# Altium PCB kt404c.pcbdoc
Units mil, origin at the board's own origin, x right, y up, seen from the top; angles counter-clockwise.
Board outline 1965 x 2475 mil, 2 copper layers (Top Layer, Bottom Layer); 19 components, 24 nets, 81 pads, 43 vias.
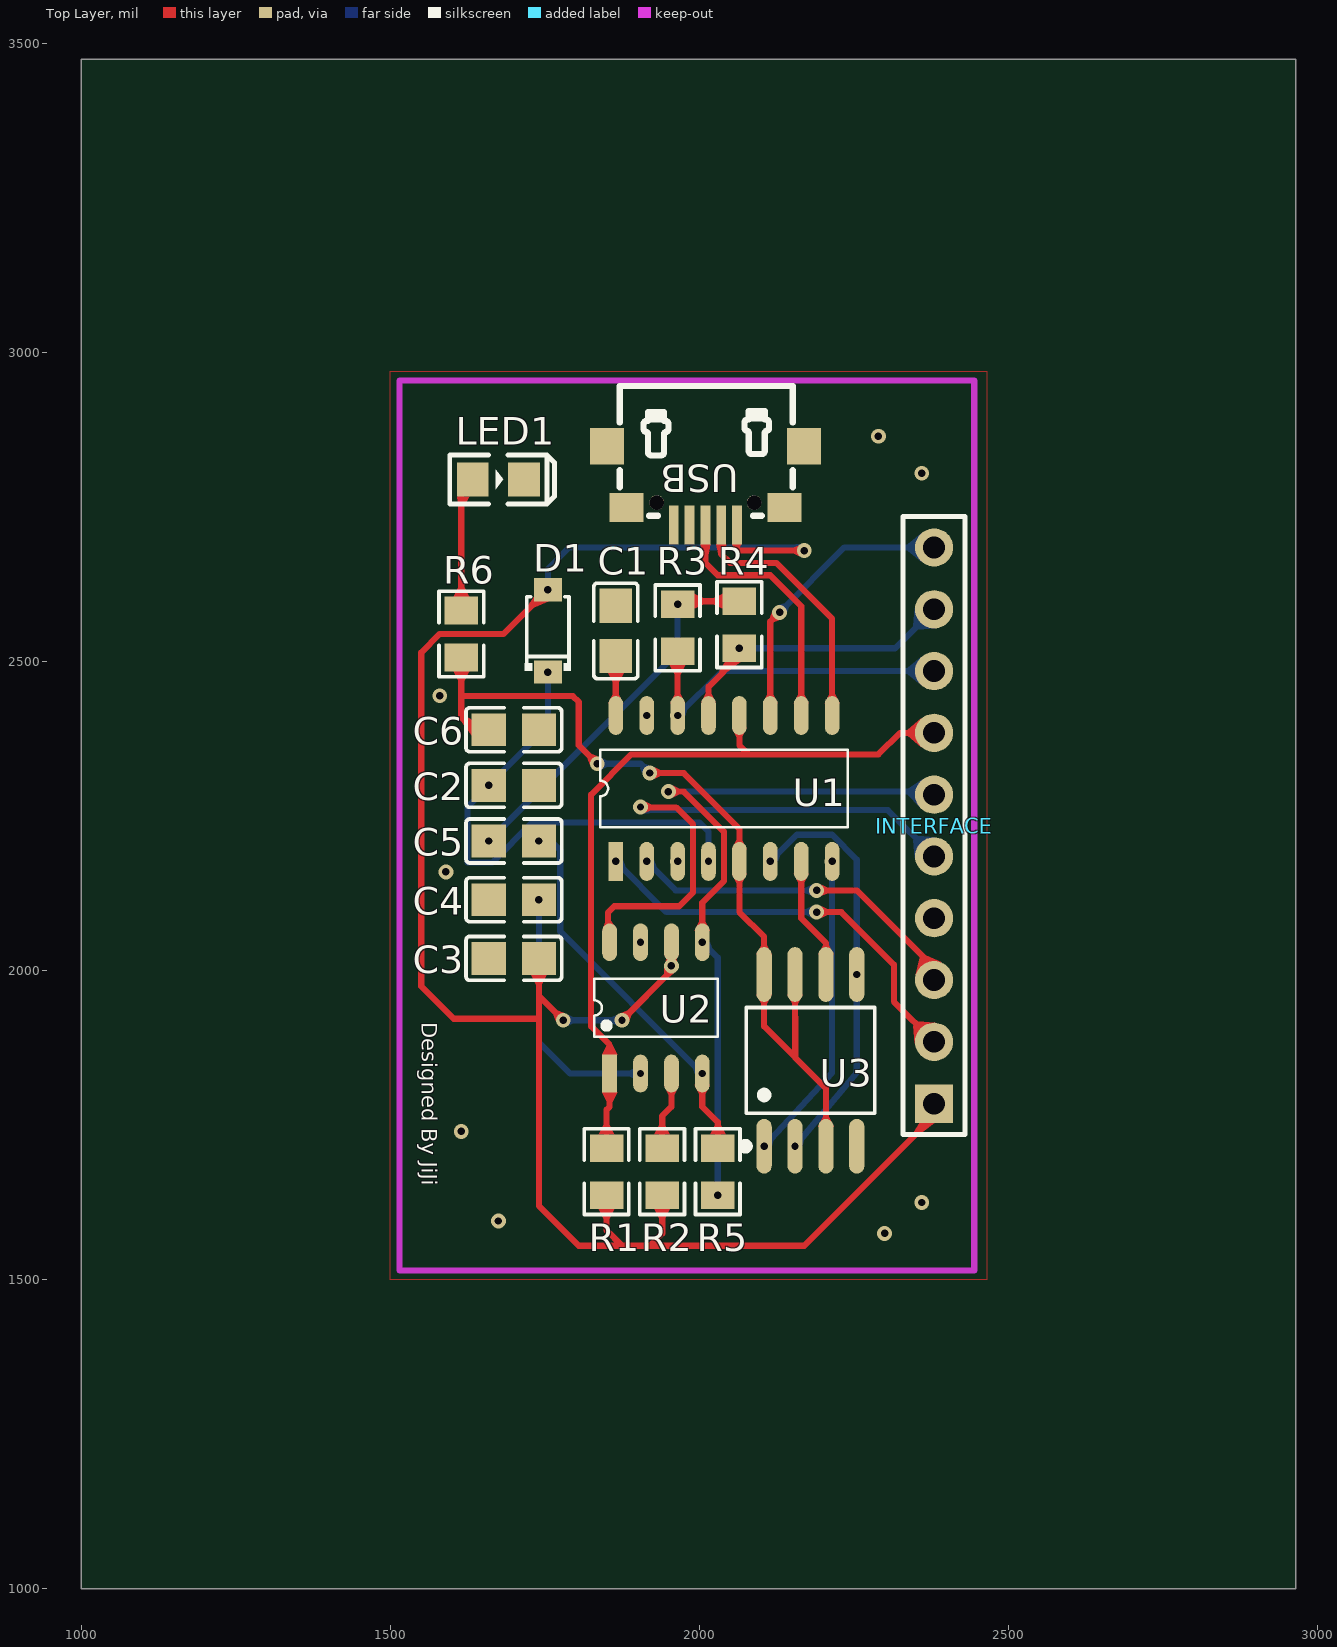
[diagram p0: Top Layer view]
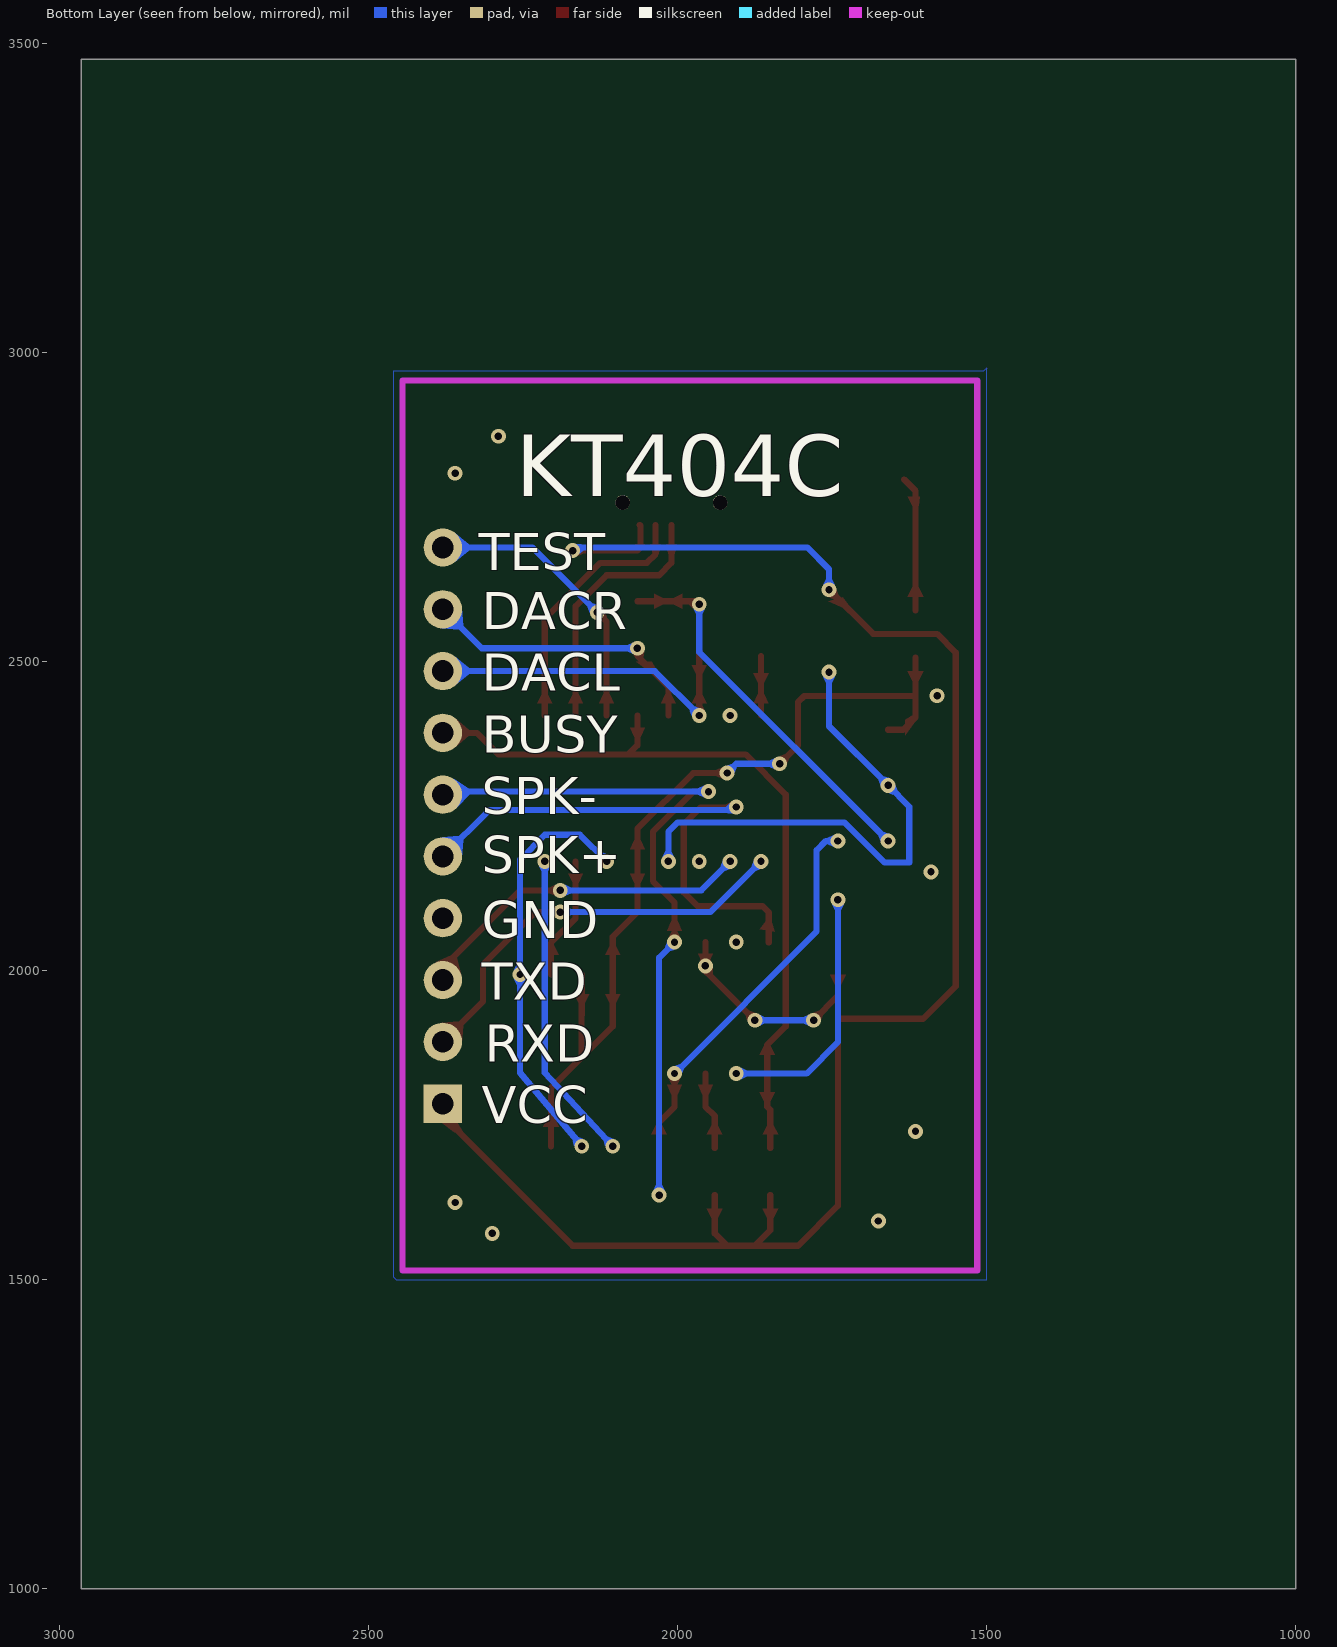
[diagram p1: Bottom Layer view, seen from below]

## Layer stack, top to bottom
Top Solder: solder mask 0.4, Solder Resist, Dk 3.5
Top Layer: signal copper 1.4
Dielectric1: dielectric 12.6, FR-4, Dk 4.8
Bottom Layer: signal copper 1.4
Bottom Solder: solder mask 0.4, Solder Resist, Dk 3.5

## Board outline
2965,1000 1000,1000 1000,3475 2965,3475

## Design rules (kind name [scope] priority, off if disabled: settings)
Clearance [All] p1: gap=10 ignorepadtopadclearanceinfootprint=FALSE except(0: Arc-Hole Track-Hole SMDPad-Hole THPad-Hole Via-Hole Fill-Hole Poly-Hole Region-Hole Text-Hole)
PolygonConnect [All] p1: connectstyle=Relief reliefconductorwidth=10 reliefentries=4 polygonreliefangle="90 Angle" airgapwidth=10
RoutingVias [All] p1: holewidth=28 width=50 viastyle="Through Hole" minholewidth=28 minwidth=50 maxholewidth=28 maxwidth=50
SolderMaskExpansion [All] p1: expansion=4 istentingtop=FALSE
Width [All] p1: maxlimit=10 minlimit=10 preferedwidth=10
30 further rules are at their usual default settings.

## Components (designator, comment, footprint, x,y, rotation, side; value= is the part's Value field where it differs from the comment)
C1 "1uF" C0805 1865,2550 r90 top
C2 "0.1u" C0805 1700,2300 r0 top
C3 "22uF" C0805 1700,2020 r180 top
C4 "1uF" C0805 1700,2115 r0 top
C5 "0.1uF" C0805 1700,2210 r180 top
C6 "1uF" C0805 1700,2390 r0 top
D1 "1N4007W" SOD-123_L2.8-W1.8-LS3.7-RD 1755,2550 r90 top
INTERFACE "HDR-F-2.54_1x10" HDR-F-2.54_1X10 2380,2235 r90 top
LED1 "LED-0805_R" LED0805_RED 1675,2795 r0 top
R1 "10k" R0805 1850,1675 r270 top
R2 "10k" R0805 1940,1675 r90 top
R3 "22k" R0805 1965,2555 r270 top
R4 "22k" R0805 2065,2560 r270 top
R5 "NC" R0805 2030,1675 r270 top
R6 "10k" R0805 1615,2545 r90 top
U1 "KT404C" SOP16 2040,2295 r90 top
U2 "HAA2018" SOP8 1930,1940 r0 top
U3 "W25Q80DVSSIG" SOIC-8_L5.3-W5.3-P1.27-LS8.0-BL 2180,1855 r0 top
USB "U-F-M5SS-W-1" MICRO-USB-SMD_MICRO-USB-A11 2010,2785 r180 top

## Footprints (in the part's own frame and the unit in brackets; to place one, negate y for a bottom-side part, rotate by r counter-clockwise, add the part's x,y. Pads: shape width x height; smd on the part's side, far side on the other; paste and mask are expansions set on the pad)
C0805 [mm]
  rect 1.41x1.35 smd: 1(-1.03,0) 2(1.03,0)
  silkscreen extent -1.96,-0.9 1.96,0.9
HDR-F-2.54_1X10 [mil]
  rect 62x62 hole 35: 1(-450,0)
  round 62 hole 35: 2(-350,0) 3(-250,0) 4(-150,0) 5(-50,0) 6(50,0) 7(150,0) 8(250,0) 9(350,0) 10(450,0)
  silkscreen extent -500,-50 500,50
LED0805_RED [mil]
  rect 51.2x55.1 smd: 1(-41.35,0) 2(41.35,0)
  silkscreen extent -79,-39 91,39
MICRO-USB-SMD_MICRO-USB-A11 [mm]
  rect 0.4x1.6 smd: 1(-1.3,1.616) 2(-0.65,1.616) 3(0,1.616) 4(0.65,1.616) 5(1.3,1.616)
  rect 1.4x1.2 smd: 6(3.25,0.893) 7(-3.25,0.893)
  rect 1.4x1.5 smd: 8(-4.051,-1.617) 9(4.051,-1.617)
  round 0.6 hole 0.6 unplated: ""(-2,0.694) ""(2,0.694)
  silkscreen extent -3.59,-4.1 3.52,1.24
R0805 [mil]
  rect 44.59x54.21 smd: 1(-38.04,0) 2(38.04,0)
  silkscreen extent -69,-36 69,36
SOD-123_L2.8-W1.8-LS3.7-RD [mm]
  rect 0.95x1.15 smd: 1(-1.693,0) 2(1.693,0)
  silkscreen extent -1.63,-0.94 1.41,0.94
SOIC-8_L5.3-W5.3-P1.27-LS8.0-BL [mm]
  oval 0.63x2.25 smd: 1(-1.905,-3.53) 2(-0.635,-3.53) 3(0.635,-3.53) 4(1.905,-3.53) 5(1.905,3.53) 6(0.635,3.53) 7(-0.635,3.53) 8(-1.905,3.53)
  silkscreen extent -2.82,-3.68 2.64,2.18
SOP8 [mil]
  rect 24x61 smd: 1(-75,-106.3)
  oval 24x61 smd: 2(-25,-106.3) 3(25,-106.3) 4(75,-106.3) 5(75,106.3) 6(25,106.3) 7(-25,106.3) 8(-75,106.3)
  silkscreen extent -100,-47 100,47
SOP16 [mm]
  rect 1.6x0.6 smd: 1(-3,4.445)
  oval 1.6x0.6 smd: 2(-3,3.175) 3(-3,1.905) 4(-3,0.635) 5(-3,-0.635) 6(-3,-1.905) 7(-3,-3.175) 8(-3,-4.445) 9(3,-4.445) 10(3,-3.175) 11(3,-1.905) 12(3,-0.635) 13(3,0.635) 14(3,1.905) 15(3,3.175) 16(3,4.445)
  silkscreen extent -1.6,-5.08 1.6,5.08

## Via types
v1: diameter 24, hole 12, Top Layer to Bottom Layer, 43 vias

## Nets (pads, with @x,y where several pads share a name; then routed paths per layer and width w, separated by ;. In a path a pad name is that pad's centre, name@x,y a point inside that pad or via, vN(x,y) a via of type N, cw(c..) or ccw(c..) an arc to the next point about the centre after c; other vN are vias at no path point)
BUSY: INTERFACE.7 R1.1 U1.12 U2.1 | length 1252.2
  Top Layer w10: R1.1 1850,1775 1855,1780 U2.1 1855,1880 1825,1910 1825,2285 1890,2350 2080,2350 ; U1.12 2065,2365 2080,2350 ; INTERFACE.7 2325,2385 2290,2350 2080,2350
C5_2: C5.2 R3.1 R4.1 | length 611.7
  Top Layer w10: v1(1965,2593.04) 1970,2598 R4.1
  Bottom Layer w10: v1(1659.45,2210) 1965,2515.55 v1(1965,2593.04)
DACL: INTERFACE.8 R3.2 U1.14 | length 548.7
  Top Layer w10: v1(1965,2413.11) 1965,2465 R3.2
  Bottom Layer w10: v1(1965,2413.11) 2036.89,2485 INTERFACE.8
DACR: INTERFACE.9 R4.2 U1.13 | length 470.7
  Top Layer w10: U1.13 2015,2460 2065,2510 v1(2065,2521.96)
  Bottom Layer w10: v1(2065,2521.96) 2316.96,2521.96 INTERFACE.9
GND: C1.2 C2.2 C3.2 C4.1 C6.2 INTERFACE.4 LED1.2 U1.3 U1.15 U2.7 U3.4 USB.5 USB.6 USB.7 USB.8 USB.9
  other v1: 2300,1575 1675,1595 2360,1625 1615,1740 1905,2046.3 1590,2160 1965,2176.89 1915,2413.11 1580,2445 2360,2805 2290,2865
LED1_1: LED1.1 R6.2 | length 219.7
  Top Layer w10: R6.2 1615,2776.4 LED1.1
OUT_3V3: C6.1 R6.1 U1.5 U3.3 U3.7 U3.8 | length 1436.1
  Top Layer w10: 1615,2444.55 1795.45,2444.55 1805,2435 1805,2365 v1(1835,2335) ; R6.1 1615,2410 1635,2390 C6.1@1659.5,2390 ; v1(1920,2320) 1975,2320 2065,2230 U1.5 2065,2095 2105,2055 U3.8 2105,1910 2205,1810 U3.3 ; U3.7 2155.5,1859.5
  Bottom Layer w10: v1(1835,2335) 1905,2335 v1(1920,2320)
RXD: INTERFACE.2 U1.1 | length 671.1
  Top Layer w10: v1(2190,2095) 2230,2095 2315,2010 2315,1950 INTERFACE.2
  Bottom Layer w10: v1(1865,2176.89) 1946.89,2095 v1(2190,2095)
S$848: 
SPICS: U1.8 U3.1 | length 503.9
  Bottom Layer w10: v1(2105,1716.02) 2215,1835 v1(2215,2176.89)
SPIDO: U1.6 U3.2 U3.5 | length 674.8
  Bottom Layer w10: v1(2115,2176.89) 2158.1,2220 2215,2220 2255,2180 2255,2000 2255,1835 v1(2155,1716.02)
  other v1: 2255,1993.98
SPISCK: U1.7 U3.6 | length 199.5
  Top Layer w10: U1.7 2165,2085 2205,2045 U3.6
SPK+: INTERFACE.5 U2.8 | length 916.7
  Top Layer w10: U2.8@1852.5,2045.7 1852.5,2094.4 1862.5,2104.4 1967.5,2104.4 1990,2126.9 1990,2236.9 1962.5,2264.4 v1@1902.5,2264.4
  Bottom Layer w10: v1(1905,2265) 1910,2260 2305,2260 INTERFACE.5
SPK-: INTERFACE.6 R5.2 U2.5 | length 1161.9
  Top Layer w10: v1(1950,2290) 1975,2290 2040,2225 2040,2145 2005,2110 v1(2005,2046.3)
  Bottom Layer w10: v1(1950,2290) 2375,2290 INTERFACE.6 ; v1(2005,2046.3) 2030,2021.3 v1(2030,1636.96)
TEST_KEY: INTERFACE.10 U1.11 | length 466.6
  Top Layer w10: U1.11 2115,2565 v1(2130,2580)
  Bottom Layer w10: v1(2130,2580) 2235,2685 INTERFACE.10
TXD: INTERFACE.3 U1.2 | length 556.2
  Top Layer w10: v1(2190,2130) 2255,2130 2380,2005 INTERFACE.3
  Bottom Layer w10: v1(1915,2176.89) 1961.89,2130 v1(2190,2130)
U1_16: C1.1 U1.16 | length 96.4
  Top Layer w10: U1.16 1865,2455 C1.1@1865,2509.5
U2_2: C4.2 U2.2 | length 416
  Bottom Layer w10: v1@1740.5,2115 1740.5,1884.5 1791.3,1833.7 v1(1905,1833.7)
  other v1: 1740.55,2115
U2_3: R2.2 U2.3 | length 126.9
  Top Layer w10: R2.2 1940,1765 1955,1780 U2.3
U2_4: C5.1 R5.1 U2.4 | length 628.3
  Top Layer w10: v1(2005,1833.7) 2005,1780 2030,1755 R5.1
  Bottom Layer w10: v1(1740.55,2210) 1760,2210 1775,2195 1775,2063.7 v1(2005,1833.7)
USBDM: U1.9 USB.2 | length 426.5
  Top Layer w10: USB.2 2035.6,2674.4 2050,2660 2125,2660 2215,2570 U1.9
USBDP: U1.10 USB.3 | length 422.3
  Top Layer w10: USB.3 2010,2660 2030,2640 2115,2640 2165,2590 U1.10
VCC: C3.1 D1.2 INTERFACE.1 R1.2 R2.1 U2.6 USB.1 | length 3280.3
  Top Layer w10: 1740.5,1922.2 1602.8,1922.2 1550,1975 1550,2515 1580,2545 1683.4,2545 v1(1755,2616.63) ; 1740.5,1959.8 v1(1780,1920) ; C3.1@1740.5,2020 1740.5,1619.5 1805,1555 1875,1555 ; R1.2 1850,1580 1875,1555 ; v1(1875,1920) 1955,2000 v1(1955,2007.94) ; R2.1 1940,1575 1920,1555 ; v1(1955,2007.94) U2.6 ; USB.1 2060,2720.2 2060,2685 2065,2680 v1(2170,2680) ; INTERFACE.1 2380,1765 2170,1555 1920,1555 ; 1875,1555 1920,1555
  Bottom Layer w10: v1(1755,2616.63) 1755,2650 1790,2685 2165,2685 v1(2170,2680) ; v1(1780,1920) v1(1875,1920)
VMCU: C2.1 D1.1 U1.4 | length 833.5
  Bottom Layer w10: v1(1659.45,2300) 1755,2395.55 v1(1755,2483.37) ; v1@1659.5,2300 1625,2265.5 1625,2175 1665,2175 1730,2240 2000,2240 2015,2225 v1(2015,2176.89)
pads on no net: USB. USB.4

## Polygon pours and split planes (outlines as drawn)
GND on Bottom Layer "Bottom Layer-GND" (solid, pour order 0): 1500,2975 1505,2970 2460,2970 2460,1505 2455,1500 1500,1500
GND on Top Layer "Top Layer-GND" (solid, pour order 1): 1500,2970 2465,2970 2465,1500 1500,1500

## Other copper
Top Layer:
  region net SPISCK: 2217.4,2025.87 2192.6,2025.87 2200,2040.87 2210,2040.87
  region net OUT_3V3: 2167.4,1962.23 2142.6,1961.95 2150.17,1947.03 2160.17,1947.15
  region net OUT_3V3: 2117.4,2025.87 2092.6,2025.87 2100,2040.87 2110,2040.87
  region net OUT_3V3: 2117.4,1962.09 2092.6,1962.09 2100,1947.09 2110,1947.09
  region net OUT_3V3: 2217.4,1747.91 2192.6,1747.91 2200,1762.91 2210,1762.91
  region net U2_3: 1967,1815.2 1943,1815.2 1950,1800.2 1960,1800.2
  region net U2_4: 2017,1815.2 1993,1815.2 2000,1800.2 2010,1800.2
  region net SPK+: 1866.83,2066.8 1843.17,2062.8 1847.5,2078.74 1857.5,2080.44
  region net VCC: 1967,2027.8 1943,2027.8 1950,2012.8 1960,2012.8
  region net SPK-: 2017,2064.8 1993,2064.8 2000,2079.8 2010,2079.8
  region net USBDM: 2226.81,2432.8 2203.19,2432.8 2210,2447.8 2220,2447.8
  region net USBDP: 2176.81,2432.8 2153.19,2432.8 2160,2447.8 2170,2447.8
  region net TEST_KEY: 2126.81,2432.8 2103.19,2432.8 2110,2447.8 2120,2447.8
  region net BUSY: 2076.81,2393.43 2053.19,2393.43 2060,2378.43 2070,2378.43
  region net DACR: 2026.81,2432.8 2003.19,2432.8 2010,2447.8 2020,2447.8
  region net DACL: 1976.81,2432.8 1953.19,2432.8 1960,2447.8 1970,2447.8
  region net U1_16: 1876.81,2432.8 1853.19,2432.8 1860,2447.8 1870,2447.8
  region net SPISCK: 2176.81,2157.2 2153.19,2157.2 2160,2142.2 2170,2142.2
  region net OUT_3V3: 2076.81,2196.57 2053.19,2196.57 2060,2211.57 2070,2211.57
  region net OUT_3V3: 2076.81,2157.2 2053.19,2157.2 2060,2142.2 2070,2142.2
  region net USBDP: 2017.88,2689.87 2002.13,2689.87 2005,2674.87 2015,2674.87
  region net USBDM: 2043.47,2689.87 2027.72,2689.87 2030.6,2674.87 2040.6,2674.87
  region net VCC: 2069.06,2689.87 2053.32,2689.87 2055,2685 2065,2685
  region net BUSY: 1843,1864.2 1867,1864.2 1860,1879.2 1850,1879.2
  region net BUSY: 1867,1803.2 1843,1803.2 1850,1788.2 1860,1788.2
  region net U2_4: 2042.5,1735.34 2017.5,1735.34 2025,1750.34 2035,1750.34
  region net C5_2: 2037.89,2610.5 2037.89,2585.5 2022.89,2593 2022.89,2603
  region net DACR: 2067.16,2499.66 2042.16,2499.66 2032.59,2484.66 2046.73,2484.66
  region net C5_2: 1992.11,2585.5 1992.11,2610.5 2007.11,2603 2007.11,2593
  region net DACL: 1977.5,2494.66 1952.5,2494.66 1960,2479.66 1970,2479.66
  region net VCC: 1927.5,1614.66 1952.5,1614.66 1945,1599.66 1935,1599.66
  region net U2_3: 1927.5,1735.34 1952.5,1735.34 1945,1750.34 1935,1750.34
  region net BUSY: 1862.5,1735.34 1837.5,1735.34 1845,1750.34 1855,1750.34
  region net VCC: 1862.5,1614.66 1837.5,1614.66 1845,1599.66 1855,1599.66
  region net VCC: 1756.43,2597.93 1732.36,2604.69 1723.05,2591.72 1734.09,2588.62
  region net VCC: 1728,1993.43 1753,1993.43 1745.5,1978.43 1735.5,1978.43
  region net U1_16: 1852.5,2481.69 1877.5,2481.69 1870,2466.69 1860,2466.69
  region net OUT_3V3: 1631.69,2405.81 1631.69,2380.81 1616.69,2401.24 1616.69,2415.38
  region net OUT_3V3: 1602.5,2484.66 1627.5,2484.66 1620,2469.66 1610,2469.66
  region net LED1_1: 1602.5,2605.34 1627.5,2605.34 1620,2620.34 1610,2620.34
  region net LED1_1: 1627.5,2767.45 1608.05,2767.45 1610,2752.45 1620,2752.45
  region net VCC: 2381.5,1754 2356.5,1754 2346.93,1739 2361.07,1739
  region net VCC: 1946,2015.88 1964,2015.88 1960,2024.28 1950,2024.28
  region net VCC: 1943.49,2004.53 1959.82,1996.95 1952.95,1990.88 1943.29,1995.36
  region net RXD: 2197.94,2086 2197.94,2104 2206.34,2100 2206.34,2090
  region net TXD: 2197.94,2121 2197.94,2139 2206.34,2135 2206.34,2125
  region net SPK+: 1913.26,2273.7 1912.6,2255.71 1921.14,2259.4 1921.51,2269.4
  region net SPK-: 1957.94,2281 1957.94,2299 1966.34,2295 1966.34,2285
  region net TEST_KEY: 2130.75,2568.02 2118.02,2580.75 2114.91,2571.98 2121.98,2564.91
  region net DACR: 2071.84,2512.1 2054.36,2516.4 2055.42,2507.49 2066.77,2504.7
  region net DACL: 1956,2421.05 1974,2421.05 1970,2429.45 1960,2429.45
  region net OUT_3V3: 1835.75,2346.98 1823.02,2334.25 1819.91,2343.02 1826.98,2350.09
  region net OUT_3V3: 1927.94,2311 1927.94,2329 1936.34,2325 1936.34,2315
  region net VCC: 1886.98,1919.25 1874.25,1931.98 1883.02,1935.09 1890.09,1928.02
  region net VCC: 1780.8,1931.97 1768.02,1919.29 1764.94,1928.07 1772.04,1935.12
  region net SPK-: 1996,2054.24 2014,2054.24 2010,2062.64 2000,2062.64
  region net U2_4: 1996,1825.76 2014,1825.76 2010,1817.36 2000,1817.36
  region net C5_2: 1975.3,2586.87 1969.83,2604.02 1978.97,2603 1982.16,2593
  region net VCC: 1755.77,2604.66 1743.02,2617.37 1739.92,2608.59 1747,2601.53
  region net VCC: 2162.06,2671 2162.06,2689 2153.66,2685 2153.66,2675
  region net RXD: 2349.06,1883.06 2381.94,1915.94 2353.69,1918.38 2346.62,1911.31
  region net TXD: 2392.2,2013.5 2350.2,1993.54 2357.09,2020.84 2366.68,2025.4
  region net BUSY: 2359.5,2361.75 2359.5,2408.25 2337.8,2390 2337.8,2380
Bottom Layer:
  region net RXD: 2182.06,2086 2182.06,2104 2173.66,2100 2173.66,2090
  region net TXD: 2182.06,2121 2182.06,2139 2173.66,2135 2173.66,2125
  region net TXD: 1926.98,2177.64 1914.25,2164.91 1923.02,2161.8 1930.09,2168.87
  region net RXD: 1876.98,2177.64 1864.25,2164.91 1873.02,2161.8 1880.09,2168.87
  region net SPK+: 1915.31,2271.14 1909.8,2254 1918.95,2255 1922.16,2265
  region net SPK-: 1957.94,2281 1957.94,2299 1966.34,2295 1966.34,2285
  region net SPICS: 2117,1715.74 2103.78,1727.96 2112.42,1731.41 2119.76,1724.62
  region net SPIDO: 2167,1716.31 2153.22,1727.89 2161.68,1731.74 2169.34,1725.31
  region net SPIDO: 2246,2001.92 2264,2001.92 2260,2010.32 2250,2010.32
  region net SPIDO: 2246,1986.04 2264,1986.04 2260,1977.64 2250,1977.64
  region net TEST_KEY: 2141.98,2579.25 2129.25,2591.98 2138.02,2595.09 2145.09,2588.02
  region net DACR: 2072.94,2512.96 2072.94,2530.96 2081.34,2526.96 2081.34,2516.96
  region net DACL: 1976.98,2412.36 1964.25,2425.09 1973.02,2428.2 1980.09,2421.13
  region net OUT_3V3: 1842.94,2326 1842.94,2344 1851.34,2340 1851.34,2330
  region net OUT_3V3: 1920.75,2331.98 1908.02,2319.25 1904.91,2328.02 1911.98,2335.09
  region net SPIDO: 2126.98,2176.14 2114.24,2188.87 2123.01,2191.98 2130.08,2184.91
  region net VMCU: 2006,2184.83 2024,2184.83 2020,2193.23 2010,2193.23
  region net VCC: 1867.06,1911 1867.06,1929 1858.66,1925 1858.66,1915
  region net VCC: 1787.94,1911 1787.94,1929 1796.34,1925 1796.34,1915
  region net SPK-: 2021,1644.9 2039,1644.9 2035,1653.3 2025,1653.3
  region net SPK-: 2016.98,2047.05 2004.25,2034.32 2013.02,2031.21 2020.09,2038.28
  region net U2_4: 1748.49,2201 1748.49,2219 1756.89,2215 1756.89,2205
  region net U2_4: 2005.75,1845.68 1993.02,1832.95 1989.91,1841.72 1996.98,1848.79
  region net U2_2: 1897.06,1824.7 1897.06,1842.7 1888.66,1838.7 1888.66,1828.7
  region net U2_2: 1749.53,2107.04 1731.53,2107.09 1735.5,2098.68 1745.5,2098.65
  region net SPICS: 2206,2168.95 2224,2168.95 2220,2160.55 2210,2160.55
  region net C5_2: 1956,2585.1 1974,2585.1 1970,2576.7 1960,2576.7
  region net C5_2: 1671.43,2209.25 1658.7,2221.98 1667.47,2225.09 1674.54,2218.02
  region net VMCU: 1660.23,2288.03 1647.47,2300.73 1644.38,2291.95 1651.47,2284.9
  region net VMCU: 1671.43,2299.25 1658.7,2311.98 1667.47,2315.09 1674.54,2308.02
  region net VMCU: 1746,2475.43 1764,2475.43 1760,2467.03 1750,2467.03
  region net VCC: 1746,2624.57 1764,2624.57 1760,2632.97 1750,2632.97
  region net VCC: 2165.2,2691 2159.69,2673.86 2152.84,2680 2156.05,2690
  region net SPK+: 2349.06,2183.06 2381.94,2215.94 2353.69,2218.38 2346.62,2211.31
  region net SPK-: 2362.39,2310.52 2356.89,2264.34 2337.5,2285 2338.69,2295
  region net DACL: 2359.5,2461.75 2359.5,2508.25 2337.8,2490 2337.8,2480
  region net DACR: 2349.06,2586.94 2381.94,2554.06 2353.69,2551.62 2346.62,2558.69
  region net TEST_KEY: 2359.5,2661.75 2359.5,2708.25 2337.8,2690 2337.8,2680

## Silkscreen, mask and mechanical layers (free items; w line width, h text height)
Top Overlay:
  text "Designed By JiJi" at 1551.33,1917 h25 r270
Bottom Overlay:
  text "KT404C" at 2262,2768 h100
  text "TEST" at 2322,2648 h60
  text "DACR" at 2317,2553 h60
  text "DACL" at 2317,2453 h60
  text "BUSY" at 2317,2353 h60
  text "SPK-" at 2317,2253 h60
  text "SPK+" at 2317,2158 h60
  text "GND" at 2317,2053 h60
  text "TXD" at 2317,1953 h60
  text "RXD" at 2312,1853 h60
  text "VCC" at 2317,1753 h60